# Altium PCB ITX.pcbdoc
Units mm, origin at the board's own origin, x right, y up, seen from the top; angles counter-clockwise.
Board outline 170.05 x 170.05 mm, 2 copper layers (Top Layer, Bottom Layer), stack 1.58 mm thick; 1 components, 0 nets, 171 pads, 0 vias.
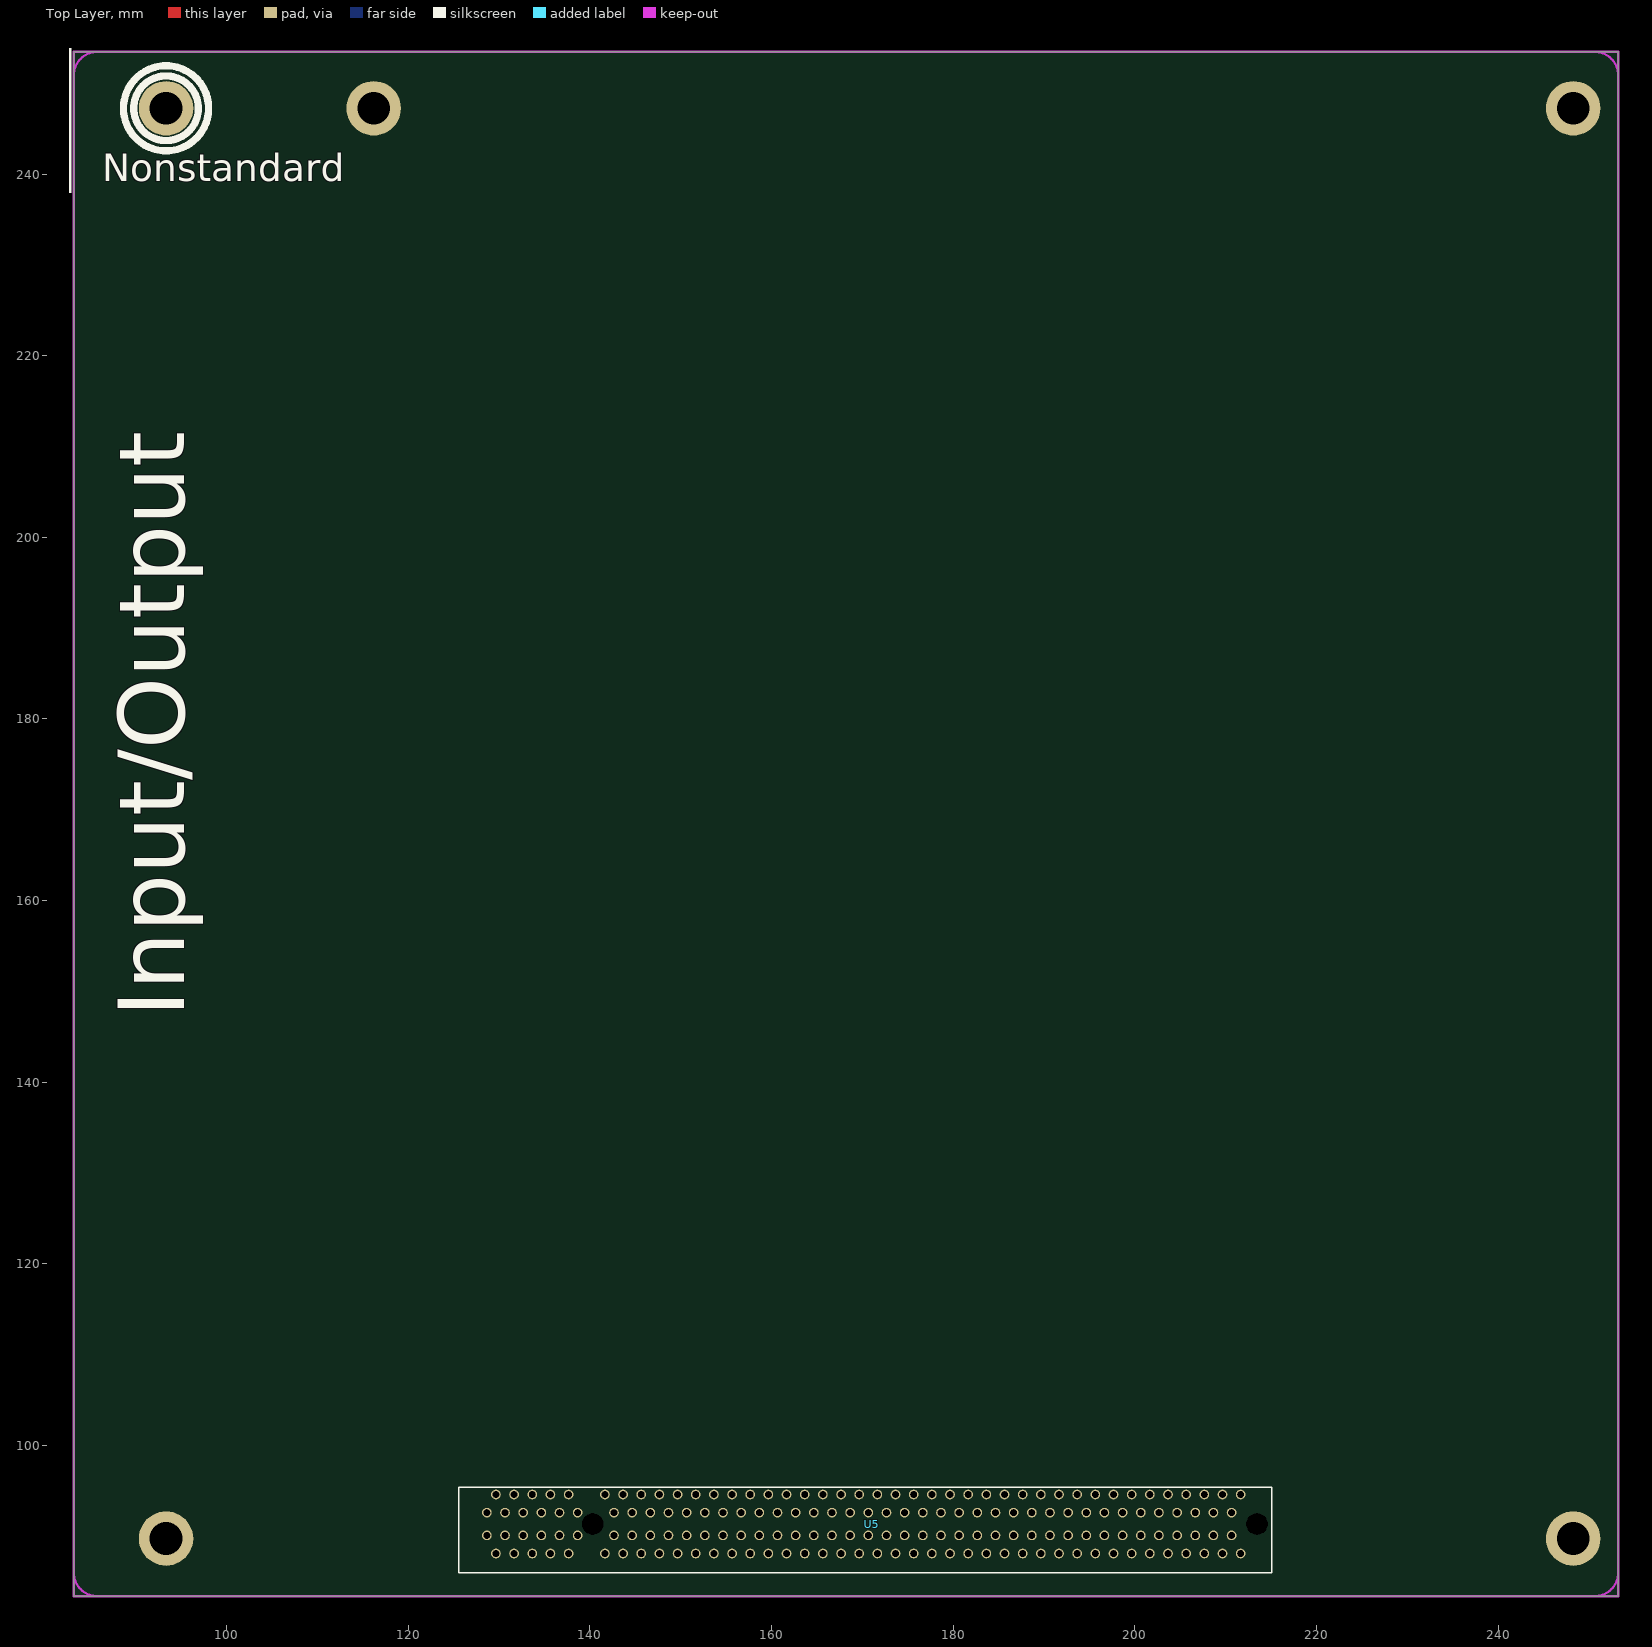
[diagram p0: Top Layer view]
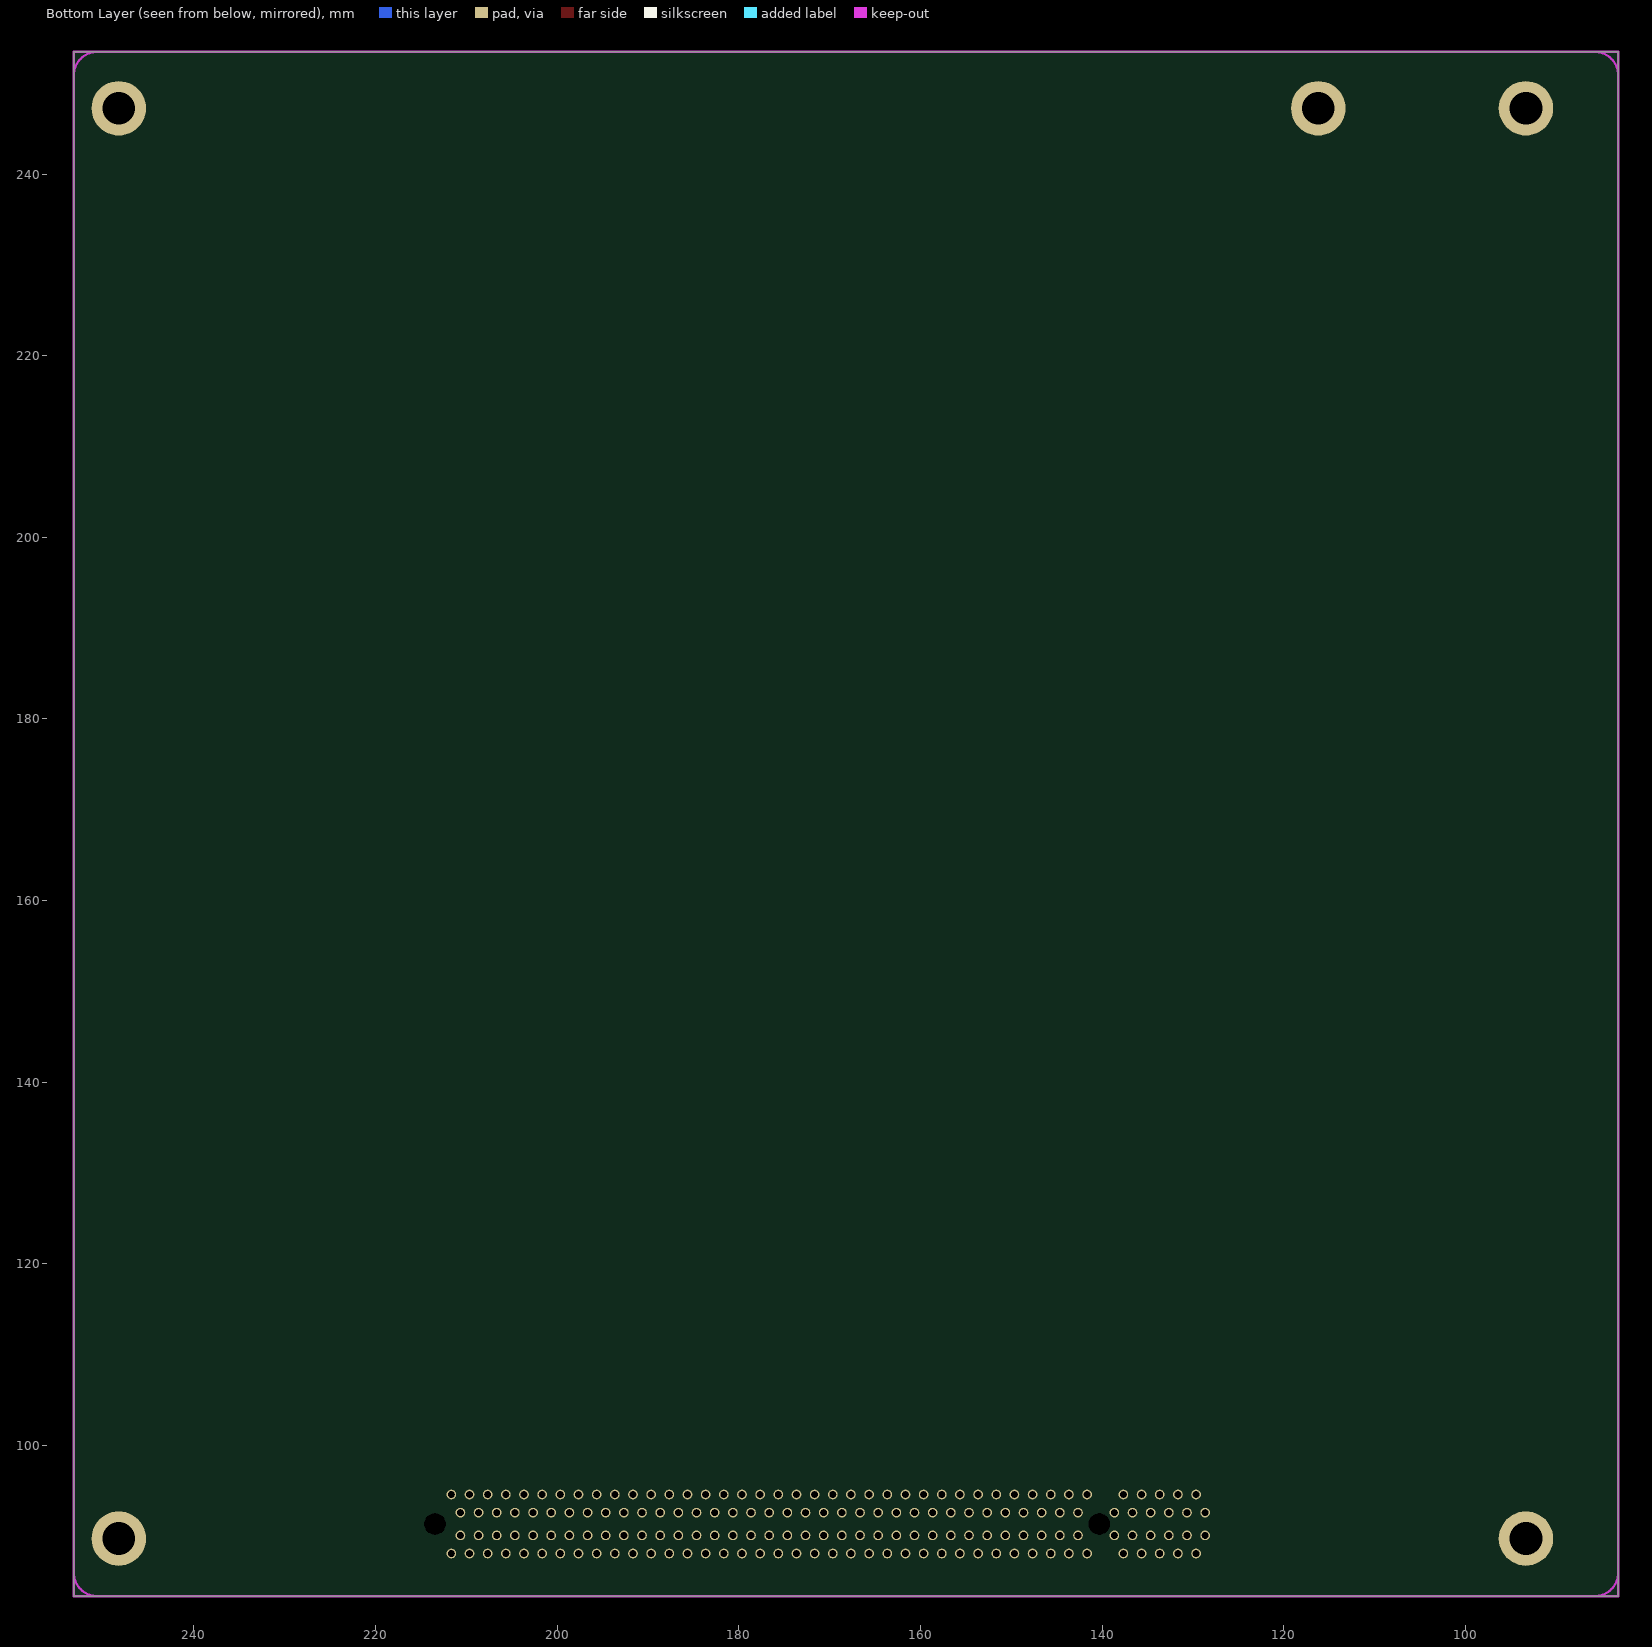
[diagram p1: Bottom Layer view, seen from below]

## Layer stack, top to bottom
Top Solder Mask Layer: solder mask 0.0102, Dk 3.3
Top Layer: signal copper 0.0356
Dielectric1: surface 1.5088, FR4, Dk 4.5
Bottom Layer: signal copper 0.0356
Bottom Solder Mask Layer: solder mask 0.0102, Dk 3.3

## Board outline
253.233,253.459 83.18,253.459 83.18,83.406 253.233,83.406

## Design rules (kind name [scope] priority, off if disabled: settings)
BoardOutlineClearance Default [All] p0: genericclearance=0.254 ignorepadtopadclearanceinfootprint=FALSE except(0: Arc-SplitContinuation Track-SplitContinuation SMDPad-SplitContinuation THPad-SplitContinuation Via-SplitContinuation Fill-SplitContinuation Poly-SplitContinuation Region-SplitContinuation Text-SplitContinuation)
BoardOutlineClearance Plane_Default [All] p0: genericclearance=0.254 ignorepadtopadclearanceinfootprint=FALSE except(0: Arc-SplitContinuation Track-SplitContinuation SMDPad-SplitContinuation THPad-SplitContinuation Via-SplitContinuation Fill-SplitContinuation Poly-SplitContinuation Region-SplitContinuation Text-SplitContinuation)
BoardOutlineClearance Copper_Default [All] p0: genericclearance=0.254 ignorepadtopadclearanceinfootprint=FALSE except(0: Arc-SplitContinuation Track-SplitContinuation SMDPad-SplitContinuation THPad-SplitContinuation Via-SplitContinuation Fill-SplitContinuation Poly-SplitContinuation Region-SplitContinuation Text-SplitContinuation)
BoardOutlineClearance otherClearance [All] p0: genericclearance=0.254 ignorepadtopadclearanceinfootprint=FALSE except(0: Arc-SplitContinuation Track-SplitContinuation SMDPad-SplitContinuation THPad-SplitContinuation Via-SplitContinuation Fill-SplitContinuation Poly-SplitContinuation Region-SplitContinuation Text-SplitContinuation)
Clearance Default [All] p1: gap=0.178 ignorepadtopadclearanceinfootprint=FALSE
Clearance Plane_Default [All] p1: gap=0.178 ignorepadtopadclearanceinfootprint=FALSE
Clearance Copper_Default [All] p1: gap=0.178 ignorepadtopadclearanceinfootprint=FALSE
Clearance otherClearance [All] p1: gap=0.178 ignorepadtopadclearanceinfootprint=FALSE
DiffPairsRouting differentialPair [All] p1: maxuncoupledlength=10 minlimit=6 maxlimit=Infinity mostfreqgap=6 toplayer_minwidth=5 toplayer_prefwidth=10 toplayer_maxwidth=100 bottomlayer_minwidth=5 bottomlayer_prefwidth=10 bottomlayer_maxwidth=100
PasteMaskExpansion Common [All] p1: expansion=0
PlaneConnect Default [All] p1: planeconnectstyle=Relief reliefexpansion=0.508 reliefentries=4 reliefconductorwidth=0 reliefairgap=0.254
PolygonConnect Default [All] p1: connectstyle=Relief reliefentries=4 reliefconductorwidth=0 polygonreliefangle="90 Angle" airgapwidth=10
RoutingVias Default [All] p1: viastyle="Through Hole" holewidth=12 minholewidth=12 maxholewidth=2362 width=12 minwidth=12 maxwidth=2362
SolderMaskExpansion Common [IsVia] p1: useseparateexpansions=TRUE expansion=-1000 expansionbottom=-1000
SolderMaskExpansion Common [All] p2: useseparateexpansions=TRUE expansion=2 expansionbottom=2
Width Default [All] p1: maxlimit=1000 minlimit=10 preferedwidth=10

## Components (designator, comment, footprint, x,y, rotation, side; value= is the part's Value field where it differs from the comment)
U5 "PCIEX16_SOLT COPY" "PCIEX16_SOLT COPY" 162.606,87.975 r0 top

## Footprints (in the part's own frame and the unit in brackets; to place one, negate y for a bottom-side part, rotate by r counter-clockwise, add the part's x,y. Pads: shape width x height; smd on the part's side, far side on the other; paste and mask are expansions set on the pad)
"PCIEX16_SOLT COPY" [mil]
  round 42 hole 28 slot 28.2 at 0 deg paste+0 mask+4: A1(-1336.4,182.3) A2(-1297,261) A3(-1257.6,182.3) A4(-1218.3,261) A5(-1178.9,182.3) A6(-1139.5,261) A7(-1100.1,182.3) A8(-1060.8,261) A9(-1021.4,182.3) A10(-982,261) A11(-942.7,182.3) A12(-824.6,261) A13(-785.2,182.3) A14(-745.8,261) A15(-706.4,182.3) A16(-667.1,261) A17(-627.7,182.3) A18(-588.3,261) A19(-549,182.3) A20(-509.6,261) A21(-470.2,182.3) A22(-430.9,261) A23(-391.5,182.3) A24(-352.1,261) A25(-312.7,182.3) A26(-273.4,261) A27(-234,182.3) A28(-194.6,261) A29(-155.3,182.3) A30(-115.9,261) A31(-76.5,182.3) A32(-37.2,261) A33(2.2,182.3) A34(41.6,261) A35(81,182.3) A36(120.3,261) A37(159.7,182.3) A38(199.1,261) A39(238.4,182.3) A40(277.8,261) A41(317.2,182.3) A42(356.5,261) A43(395.9,182.3) A44(435.3,261) A45(474.7,182.3) A46(514,261) A47(553.4,182.3) A48(592.8,261) A49(632.1,182.3) A50(671.5,261) A51(710.9,182.3) A52(750.2,261) A53(789.6,182.3) A54(829,261) A55(868.4,182.3) A56(907.7,261) A57(947.1,182.3) A58(986.5,261) A59(1025.8,182.3) A60(1065.2,261) A61(1104.6,182.3) A62(1143.9,261) A63(1183.3,182.3) A64(1222.7,261) A65(1262.1,182.3) A66(1301.4,261) A67(1340.8,182.3) A68(1380.2,261) A69(1419.5,182.3) A70(1458.9,261) A71(1498.3,182.3) A72(1537.6,261) A73(1577,182.3) A74(1616.4,261) A75(1655.8,182.3) A76(1695.1,261) A77(1734.5,182.3) A78(1773.9,261) A79(1813.2,182.3) A80(1852.6,261) A81(1892,182.3) A82(1931.4,261) B1(-1336.4,83.8) B2(-1297,5.1) B3(-1257.6,83.8) B4(-1218.3,5.1) B5(-1178.9,83.8) B6(-1139.5,5.1) B7(-1100.1,83.8) B8(-1060.8,5.1) B9(-1021.4,83.8) B10(-982,5.1) B11(-942.7,83.8) B12(-824.6,5.1) B13(-785.2,83.8) B14(-745.8,5.1) B15(-706.4,83.8) B16(-667.1,5.1) B17(-627.7,83.8) B18(-588.3,5.1) B19(-549,83.8) B20(-509.6,5.1) B21(-470.2,83.8) B22(-430.9,5.1) B23(-391.5,83.8) B24(-352.1,5.1) B25(-312.7,83.8) B26(-273.4,5.1) B27(-234,83.8) B28(-194.6,5.1) B29(-155.3,83.8) B30(-115.9,5.1) B31(-76.5,83.8) B32(-37.2,5.1) B33(2.2,83.8) B34(41.6,5.1) B35(81,83.8) B36(120.3,5.1) B37(159.7,83.8) B38(199.1,5.1) B39(238.4,83.8) B40(277.8,5.1) B41(317.2,83.8) B42(356.5,5.1) B43(395.9,83.8) B44(435.3,5.1) B45(474.7,83.8) B46(514,5.1) B47(553.4,83.8) B48(592.8,5.1) B49(632.1,83.8) B50(671.5,5.1) B51(710.9,83.8) B52(750.2,5.1) B53(789.6,83.8) B54(829,5.1) B55(868.4,83.8) B56(907.7,5.1) B57(947.1,83.8) B58(986.5,5.1) B59(1025.8,83.8) B60(1065.2,5.1) B61(1104.6,83.8) B62(1143.9,5.1) B63(1183.3,83.8) B64(1222.7,5.1) B65(1262.1,83.8) B66(1301.4,5.1) B67(1340.8,83.8) B68(1380.2,5.1) B69(1419.5,83.8) B70(1458.9,5.1) B71(1498.3,83.8) B72(1537.6,5.1) B73(1577,83.8) B74(1616.4,5.1) B75(1655.8,83.8) B76(1695.1,5.1) B77(1734.5,83.8) B78(1773.9,5.1) B79(1813.2,83.8) B80(1852.6,5.1) B81(1892,83.8) B82(1931.4,5.1)
  round 10 hole 93 slot 93.2 at 0 deg unplated paste+0 mask+4: NP1(-877.7,133.1) NP2(2002.2,133.1)
  silkscreen extent -1459,-78 2065,292

## Free pads (board coordinates)
  round 5.999 hole 3.599 paste+0 mask+0.051: 89(93.34,89.756) 89(93.34,247.236) 89(116.2,247.236) 89(248.28,89.756) 89(248.28,247.236)

## Nets (pads, with @x,y where several pads share a name; then routed paths per layer and width w, separated by ;. In a path a pad name is that pad's centre, name@x,y a point inside that pad or via, vN(x,y) a via of type N, cw(c..) or ccw(c..) an arc to the next point about the centre after c; other vN are vias at no path point)
pads on no net: U5.A1 U5.A2 U5.A3 U5.A4 U5.A5 U5.A6 U5.A7 U5.A8 U5.A9 U5.A10 U5.A11 U5.A12 U5.A13 U5.A14 U5.A15 U5.A16 U5.A17 U5.A18 U5.A19 U5.A20 U5.A21 U5.A22 U5.A23 U5.A24 U5.A25 U5.A26 U5.A27 U5.A28 U5.A29 U5.A30 U5.A31 U5.A32 U5.A33 U5.A34 U5.A35 U5.A36 U5.A37 U5.A38 U5.A39 U5.A40 U5.A41 U5.A42 U5.A43 U5.A44 U5.A45 U5.A46 U5.A47 U5.A48 U5.A49 U5.A50 U5.A51 U5.A52 U5.A53 U5.A54 U5.A55 U5.A56 U5.A57 U5.A58 U5.A59 U5.A60 U5.A61 U5.A62 U5.A63 U5.A64 U5.A65 U5.A66 U5.A67 U5.A68 U5.A69 U5.A70 U5.A71 U5.A72 U5.A73 U5.A74 U5.A75 U5.A76 U5.A77 U5.A78 U5.A79 U5.A80 U5.A81 U5.A82 U5.B1 U5.B2 U5.B3 U5.B4 U5.B5 U5.B6 U5.B7 U5.B8 U5.B9 U5.B10 U5.B11 U5.B12 U5.B13 U5.B14 U5.B15 U5.B16 U5.B17 U5.B18 U5.B19 U5.B20 U5.B21 U5.B22 U5.B23 U5.B24 U5.B25 U5.B26 U5.B27 U5.B28 U5.B29 U5.B30 U5.B31 U5.B32 U5.B33 U5.B34 U5.B35 U5.B36 U5.B37 U5.B38 U5.B39 U5.B40 U5.B41 U5.B42 U5.B43 U5.B44 U5.B45 U5.B46 U5.B47 U5.B48 U5.B49 U5.B50 U5.B51 U5.B52 U5.B53 U5.B54 U5.B55 U5.B56 U5.B57 U5.B58 U5.B59 U5.B60 U5.B61 U5.B62 U5.B63 U5.B64 U5.B65 U5.B66 U5.B67 U5.B68 U5.B69 U5.B70 U5.B71 U5.B72 U5.B73 U5.B74 U5.B75 U5.B76 U5.B77 U5.B78 U5.B79 U5.B80 U5.B81 U5.B82 U5.NP1 U5.NP2

## Keep-outs
Board Outline Layer:
  lines w0.254: 83.18,85.999 83.19,85.773 83.221,85.55 83.269,85.329 83.337,85.113 83.424,84.905 83.528,84.704 83.65,84.513 83.787,84.333 83.939,84.165 84.107,84.013 84.285,83.876 84.478,83.754 84.679,83.65 84.887,83.563 85.103,83.495 85.324,83.447 85.547,83.416 85.773,83.406 ; 83.18,250.866 83.19,251.092 83.221,251.315 83.269,251.536 83.337,251.752 83.424,251.96 83.528,252.161 83.65,252.354 83.787,252.532 83.939,252.7 84.107,252.852 84.285,252.989 84.478,253.111 84.679,253.215 84.887,253.301 85.103,253.37 85.324,253.418 85.547,253.449 85.773,253.459 ; 250.64,83.406 250.866,83.416 251.089,83.447 251.31,83.495 251.526,83.563 251.734,83.65 251.935,83.754 252.125,83.876 252.306,84.013 252.473,84.165 252.626,84.333 252.763,84.513 252.885,84.704 252.989,84.905 253.075,85.113 253.144,85.329 253.192,85.55 253.223,85.773 253.233,85.999 ; 250.64,253.459 250.866,253.449 251.089,253.418 251.31,253.37 251.526,253.301 251.734,253.215 251.935,253.111 252.125,252.989 252.306,252.852 252.473,252.7 252.626,252.532 252.763,252.354 252.885,252.161 252.989,251.96 253.075,251.752 253.144,251.536 253.192,251.315 253.223,251.092 253.233,250.866 ; 83.18,83.406 83.18,253.459 253.233,253.459 253.233,83.406 83.18,83.406

## Silkscreen, mask and mechanical layers (free items; w line width, h text height)
Top Silkscreen Layer:
  drawing of 181 lines, arcs and shapes, not listed
  text "Nonstandard" at 86.33,239.187 h3
  text "Input/Output" at 95.344,147.163 h7.37 r90
Document Layer:
  drawing of 182 lines, arcs and shapes, not listed
  text "Nonstandard" at 86.33,239.187 h3

## Dimensions
102.697,89.756 to 102.697,91.326 on Document Layer
93.34,77.991 to 140.279,77.991 on Document Layer
93.34,256.002 to 248.28,256.002 on Document Layer
259.159,89.756 to 259.159,247.236 on Document Layer
93.34,257.355 to 116.2,257.355 on Document Layer
83.18,77.996 to 93.34,77.996 on Document Layer
259.169,83.406 to 259.169,89.756 on Document Layer
81.74,253.474 to 81.597,94.724 on Document Layer
83.18,76.2 to 253.18,76.2 on Document Layer
76.2,83.406 to 76.2,253.406 on Document Layer